# EAGLE board bubble size sensor (EAGLE 6.6.0)
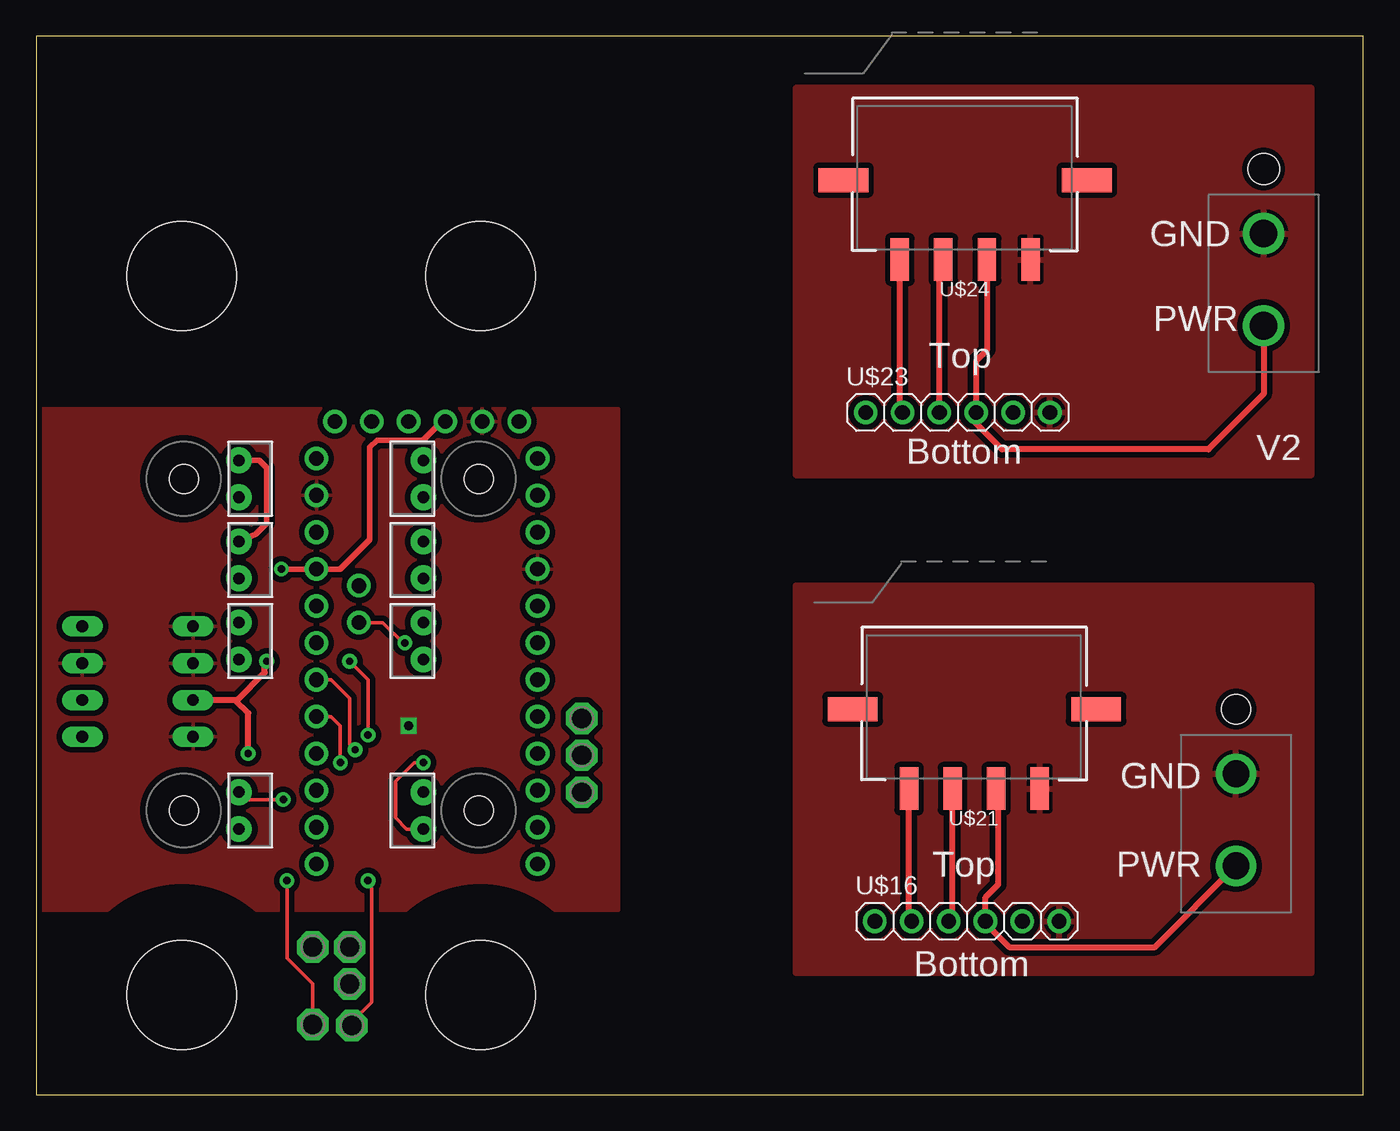
[diagram p0: board, top side]
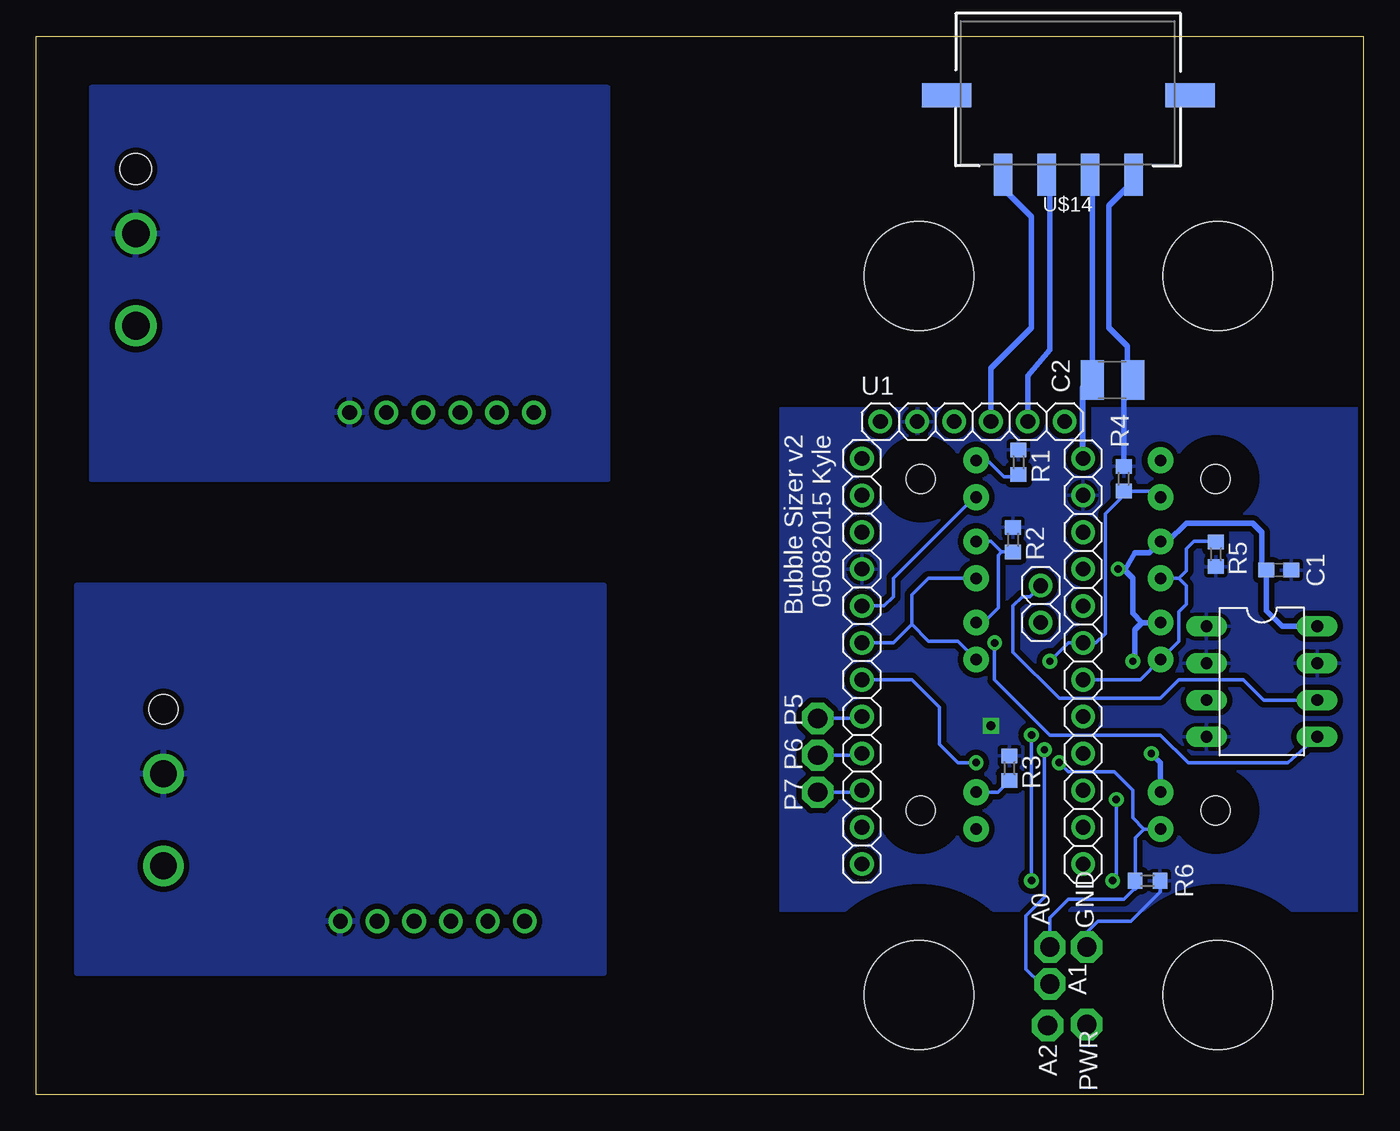
[diagram p1: board, bottom side, seen from below]

Size 91.44 x 72.9 mm. Coordinates in mm from the lower left corner, seen from the top.
Outline: 0,0 91.44,0 91.44,72.9 0,72.9 0,0
Copper layers (1*16): Top 0.035mm / dielectric 1.5mm / Bottom 0.035mm
Design rules "SparkFun": minimum track width 8mil, minimum drill 20mil, track to track 8mil, track to pad 8mil, pad to pad 8mil, via to via 8mil, smd to smd 8mil, copper to edge 8mil, drill to drill 8mil, minimum pad ring 12mil, minimum via ring 10mil, stop-mask expansion 4mil, vias tented up to drill 20mil, thermal gap 10mil
Net classes: 0 default: width 0.254 mm, drill 0.508 mm, clearance 0.254 mm

## Footprints (pad centres in the part's own frame; a part is rotated, then mirrored left to right if it is on the bottom)
P1-13 = drill 1.321 pad 2.159 octagon: TP 0,0
C0603 = smd 1.1 x 1: 1 -0.85,0; 2 0.85,0
C1210 = smd 1.6 x 2.7: 1 -1.4,0; 2 1.4,0
DIL08 = drill 0.813 long: 1 -3.81,-3.81; 2 -1.27,-3.81; 3 1.27,-3.81; 4 3.81,-3.81; 5 3.81,3.81; 6 1.27,3.81; 7 -1.27,3.81; 8 -3.81,3.81
1X02 = drill 1.016: 1 -1.27,0; 2 1.27,0
R0603 = smd 1 x 1.1: 1 -0.85,0; 2 0.85,0
1X6 = drill 1.016: 1 -6.35,0; 2 -3.81,0; 3 -1.27,0; 4 1.27,0; 5 3.81,0; 6 6.35,0
LED_LAYOUT = drill 0.8 pad 1.778: PWR 1.27,0; RSTR -1.27,0
M2_SCREW_HOLE = hole 2: 0,0
1X12 = drill 1.016: 1 -13.97,0; 2 -11.43,0; 3 -8.89,0; 4 -6.35,0; 5 -3.81,0; 6 -1.27,0; 7 1.27,0; 8 3.81,0; 9 6.35,0; 10 8.89,0; 11 11.43,0; 12 13.97,0
MICRO_FIT3.0_4POS-SM = smd 1.27 x 2.92: 1 -4.5,5.47; 2 -1.5,5.47; 3 1.5,5.47; 4 4.5,5.47 | smd 3.43 x 1.65: MOUNT1 -8.385,0; MOUNT2 8.385,0
UBOLT_HOLE = hole 7.541: 0,0
2PN_MOLEX = drill 1.854: P$1 4.445,3.81; P$2 10.795,3.81 | hole 2.032: 0,3.81
2PN_MOLEX_V2 = drill 1.905: P$1 4.445,3.81; P$2 10.795,3.81 | hole 2.159: 0,3.81

## Placement (x,y rotation side)
A0  TPPAD1-13  [P1-13]  21.59,10.16 0 top
A1  TPPAD1-13  [P1-13]  21.59,7.62 90 top
A2  TPPAD1-13  [P1-13]  21.74,4.75 0 top
C1  [C0603]  5.82,36.12 0 bottom
C2  [C1210]  17.27,49.23 0 bottom
GND  TPPAD1-13  [P1-13]  19.05,10.16 0 top
IC1  [DIL08]  6.99,28.45 270 bottom
JP1  [1X02]  22.23,33.78 270 bottom
P5  TPPAD1-13  [P1-13]  37.59,25.91 0 top
P6  TPPAD1-13  [P1-13]  37.59,23.37 0 top
P7  TPPAD1-13  [P1-13]  37.59,20.83 0 top
PWR  TPPAD1-13  [P1-13]  19.05,4.83 90 top
R1  6.2K  [R0603]  23.75,43.56 270 bottom
R2  6.2K  [R0603]  24.13,38.23 270 bottom
R3  6.2K  [R0603]  24.38,22.48 270 bottom
R4  10K  [R0603]  16.51,42.42 90 bottom
R5  10K  [R0603]  10.16,37.21 270 bottom
R6  10K  [R0603]  14.86,14.73 0 bottom
U1  PINHD-1X6  [1X6]  26.92,46.35 0 bottom
U$1  IR928-6C-F  [LED_LAYOUT]  26.67,42.42 270 top
U$2  IR928-6C-F  [LED_LAYOUT]  26.67,36.83 270 top
U$3  IR928-6C-F  [LED_LAYOUT]  26.67,19.56 270 top
U$4  PT928-6B-F  [LED_LAYOUT]  13.97,19.56 90 top
U$5  PT928-6B-F  [LED_LAYOUT]  13.97,36.83 90 top
U$6  PT928-6B-F  [LED_LAYOUT]  13.97,42.42 90 top
U$7  M2_SCREW_HOLE  [M2_SCREW_HOLE]  10.16,42.42 0 top
U$8  PINHD-LHS  [1X12]  34.54,29.84 270 bottom
U$9  IR928-6C-F  [LED_LAYOUT]  26.67,31.24 270 top
U$10  PINHD-RHS  [1X12]  19.3,29.84 90 bottom
U$11  PT928-6B-F  [LED_LAYOUT]  13.97,31.24 90 top
U$12  M2_SCREW_HOLE  [M2_SCREW_HOLE]  30.48,42.42 0 top
U$13  M2_SCREW_HOLE  [M2_SCREW_HOLE]  10.16,19.56 0 top
U$14  MICROFIT3.0_4POS_SMD  [MICRO_FIT3.0_4POS-SM]  20.32,68.83 180 bottom
U$15  M2_SCREW_HOLE  [M2_SCREW_HOLE]  30.48,19.56 0 top
U$16  PINHD-FTDI  [1X6]  64.14,11.94 0 top
U$17  UBOLT_HOLE  [UBOLT_HOLE]  30.61,56.39 0 top
U$18  UBOLT_HOLE  [UBOLT_HOLE]  10.03,56.39 0 top
U$19  UBOLT_HOLE  [UBOLT_HOLE]  10.03,6.86 0 top
U$20  UBOLT_HOLE  [UBOLT_HOLE]  30.61,6.86 0 top
U$21  MICROFIT3.0_4POS_SMD  [MICRO_FIT3.0_4POS-SM]  64.64,26.54 180 top
U$22  2PN_MOLEX  [2PN_MOLEX]  78.87,26.54 270 top
U$23  PINHD-FTDI  [1X6]  63.5,46.99 0 top
U$24  MICROFIT3.0_4POS_SMD  [MICRO_FIT3.0_4POS-SM]  64.01,62.99 180 top
U$25  2PN_MOLEX_V2  [2PN_MOLEX_V2]  80.77,63.75 270 top

## Library data of the parts
A0 A1 A2 GND P5-P7 PWR = testpad
C1 C2 = rcl
IC1 = ic-package
JP1 U1 U$1-U$25 = kyle
R1-R6 = resistor

## Nets
2: U$1.PWR U$8.5
3: U$2.PWR U$8.6 U$9.PWR
4: U$3.PWR U$8.7
5: P5.TP U$8.8
6: P6.TP U$8.9
7: P7.TP U$8.10
A0: A0.TP R6.1 U$4.RSTR U$10.5
A1: A1.TP R5.1 U$5.RSTR U$10.6 U$11.RSTR
A2: A2.TP R4.1 U$6.RSTR U$10.7
A4: IC1.5 JP1.2
A5: IC1.6 JP1.1
GND: C1.2 C2.2 GND.TP IC1.1 IC1.2 IC1.4 IC1.7 R1.1 R2.1 R3.1 R4.2 R5.2 R6.2 U1.2 U$8.4 U$10.11 U$14.1
GND2: U$16.6 U$21.1 U$22.P$1
GND3: U$23.6 U$24.1 U$25.P$1
N$1: R1.2 U$1.RSTR
N$2: R2.2 U$2.RSTR U$9.RSTR
N$3: R3.2 U$3.RSTR
N$4: U$23.4 U$24.2 U$25.P$2
N$5: U1.4 U$14.4
N$6: C2.1 U$10.12 U$14.2
N$7: U1.5 U$14.3
N$8: U$16.4 U$21.2 U$22.P$2
N$9: U$16.2 U$21.4
N$10: U$16.3 U$21.3
N$11: U$23.2 U$24.4
N$12: U$23.3 U$24.3
VCC: C1.1 IC1.3 IC1.8 PWR.TP U1.3 U$4.PWR U$5.PWR U$6.PWR U$10.9 U$11.PWR

## Tracks (layer width: path | path; a pad name or v marks a point on that pad's centre or on a via)
2
  Bottom 0.254: U$1.PWR 26.8,41.15 32.38,35.56 32.38,34.29 33.02,33.66 U$8.5
3
  Bottom 0.254: 31.11,32.38 31.11,34.42 29.97,35.56 U$2.PWR | 31.11,32.38 32.38,31.11 U$8.6 | U$9.PWR 27.94,31.24 29.97,31.24 31.11,32.38
4  (via drill 0.51)
  Top 0.254: U$3.PWR 25.53,18.29 24.77,19.05 24.77,21.59 26.04,22.86 v26.67,22.86
  Bottom 0.254: v26.67,22.86 27.94,22.86 29.21,24.13 29.21,26.67 31.11,28.57 U$8.7
5
  Bottom 0.254: P5.TP 34.67,25.91 U$8.8
6
  Bottom 0.254: P6.TP 34.67,23.37 U$8.9
7
  Bottom 0.254: P7.TP 34.67,20.83 U$8.10
A0  (via drill 0.51)
  Top 0.254: v20.95,22.86 20.95,25.4 20.32,26.04 U$10.5
  Bottom 0.254: 15.11,18.29 15.88,19.05 15.88,20.95 17.14,22.23 20.32,22.23 v20.95,22.86 | 15.11,18.29 15.71,17.69 R6.1 | A0.TP 21.59,12.19 20.32,13.46 16.51,13.46 15.75,14.22 | 15.11,18.29 U$4.RSTR
  Bottom 0.406: R6.1 15.71,14.26 15.75,14.22
A1  (via drill 0.51)
  Top 0.254: U$10.6 20.32,28.57 21.59,27.3 21.59,24.13 v21.97,23.75
  Bottom 0.254: A1.TP 22.23,7.62 23.24,8.64 23.24,12.32 21.97,13.59 v21.97,23.75 | 12.7,35.56 12.19,35.05 12.19,33.78 12.7,33.27 12.7,31.24 U$11.RSTR | U$5.RSTR 12.7,35.56 | 12.7,35.56 12.19,36.07 12.19,37.59 11.68,38.1 10.2,38.1 R5.1 | U$10.6 15.37,28.57 U$11.RSTR | U$11.RSTR 13.84,29.97
A2  (via drill 0.51)
  Top 0.254: v21.59,29.84 22.86,28.57 v22.86,24.77 | v22.86,14.73 22.86,14.48 23.11,14.22 23.11,6.35 21.97,5.21 21.97,4.98 A2.TP
  Bottom 0.254: v21.59,29.84 20.32,31.11 U$10.7 18.41,31.11 17.78,31.75 17.78,40.01 16.51,41.27 R4.1 14.39,41.57 U$6.RSTR | v22.86,24.77 v22.86,14.73
A4  (via drill 0.51)
  Top 0.254: v25.4,31.11 25.27,31.11 23.88,32.51 JP1.2
  Bottom 0.254: IC1.5 5.21,22.86 12.06,22.86 13.97,24.77 21.59,24.77 25.4,28.57 v25.4,31.11
A5
  Bottom 0.254: IC1.6 6.86,27.18 8.26,28.57 12.7,28.57 13.97,27.3 20.95,27.3 24.13,30.48 24.13,33.66 23.5,34.29 22.99,34.29 JP1.1
GND  (via drill 0.6)
  Bottom 0.254: GND.TP 19.05,11.18 18.29,11.94 16,11.94 13.97,13.97 13.97,14.69 R6.2
  Bottom 0.381: R4.2 16.51,47.83 C2.2 | R6.2 14.01,14.95 | 16.26,49.23 16.26,51.56 17.53,52.83 17.53,61.21 16,62.74
  Bottom 0.406: C2.2 16.26,49.23 | 16,62.74 16,63.18 U$14.1
  other vias: 25.65,25.4
  pour Top (isolate 0.381): 0,47.24 40.13,47.24 40.13,12.7 0,12.7
  pour Bottom (isolate 0.381): 0,47.24 40.13,47.24 40.13,12.7 0,12.7
GND2
  Top 0.406: 69.34,20.07 69.34,20.87 U$21.1
  pour Top (isolate 0.381): 87.88,8.38 87.88,35.05 52.32,35.05 52.32,8.38
  pour Bottom (isolate 0.381): 52.32,35.05 88.65,35.05 88.65,8.38 52.32,8.38
GND3
  pour Top (isolate 0.381): 87.88,42.67 87.88,69.34 52.32,69.34 52.32,42.67
  pour Bottom (isolate 0.381): 52.07,69.34 87.63,69.34 87.63,42.42 52.07,42.42
N$1
  Bottom 0.254: U$1.RSTR 25.91,43.69 24.77,42.55 23.91,42.55 R1.2
N$2
  Bottom 0.254: R2.2 24.93,37.38 | 24.93,37.38 25.65,38.1 U$2.RSTR | U$9.RSTR 26.16,32.51 25.15,33.53 25.15,37.16 24.93,37.38
N$3
  Bottom 0.254: U$3.RSTR 25.18,20.83 R3.2
N$4
  Top 0.406: U$23.4 64.77,47.5 | 64.77,47.5 64.77,50.55 65.53,51.31 65.53,57.5 U$24.2 | U$25.P$2 84.58,48.26 80.77,44.45 66.55,44.45 64.52,46.48 64.52,47.24 64.77,47.5
N$5
  Bottom 0.381: U1.4 25.65,50.04 22.86,52.83 22.86,60.45 24.89,62.48
  Bottom 0.406: 24.89,62.48 24.89,63.29 U$14.4
N$6
  Bottom 0.381: C2.1 18.67,63.22
  Bottom 0.406: U$10.12 19.3,48.77 18.85,49.23 C2.1 | 18.67,63.22 U$14.2
N$7
  Bottom 0.381: U1.5 23.11,49.53 21.59,51.31 21.59,62.23
  Bottom 0.406: 21.59,62.23 22.1,62.74 22.1,63.09 U$14.3
N$8
  Top 0.406: U$21.2 66.29,20.92 66.29,14.48 65.41,13.59 U$16.4 65.41,11.81 67.06,10.16 77.09,10.16 U$22.P$2
N$9
  Top 0.406: U$16.2 60.14,11.94 U$21.4
N$10
  Top 0.406: U$16.3 63.14,11.94 U$21.3
N$11
  Top 0.406: U$23.2 59.51,46.99 U$24.4
N$12
  Top 0.406: U$23.3 62.23,56.9 62.51,56.9 U$24.3
VCC  (via drill 0.51)
  Top 0.254: PWR.TP 19.05,7.62 17.27,9.4 v17.27,14.73 | v17.02,20.32 14.48,20.32 U$4.PWR | U1.3 27.94,46.35
  Top 0.381: U$5.PWR 15.11,38.61 15.88,39.37 15.88,43.18 15.37,43.69 U$6.PWR | v16.89,36.2 U$10.9 20.95,36.2 22.99,38.23 22.99,44.58 23.5,45.09 26.67,45.09 27.94,46.35
  Top 0.406: v14.61,23.5 14.61,26.29 13.72,27.18 | 13.72,27.18 IC1.3 | 13.72,27.18 13.84,27.18 15.75,29.08 15.75,29.72 v15.88,29.84
  Bottom 0.254: v17.02,20.32 17.02,14.99 v17.27,14.73 | 12.06,39.37 12.19,39.37
  Bottom 0.381: v16.89,36.2 16.51,36.2 | 16.51,36.2 16.38,36.2 15.75,37.34 14.73,37.34 U$5.PWR 13.46,38.1 12.19,39.37 | 12.06,39.37 7.62,39.37 6.99,38.73 6.99,36.44 C1.1 6.67,33.34 5.59,32.26 IC1.8 | U$4.PWR 13.97,22.86 v14.61,23.5 | 16.51,36.2 15.88,35.56 15.88,33.15 15.24,32.51 | 15.24,32.51 15.75,32 15.75,29.97 v15.88,29.84 | U$11.PWR 15.24,32.51

## Text on the board
tNames: GND | PWR | Top | V2 | Bottom | GND | Top | PWR | Bottom
bNames: Bubble Sizer v2 / 05082015 Kyle | P5 | P6 | P7 | A0 | GND | A1 | A2 | PWR
tDocu: V1